# Altium PCB Anolog Input.PcbDoc
Units mm, origin at the board's own origin, x right, y up, seen from the top; angles counter-clockwise.
Board outline 37.5 x 45 mm, 2 copper layers (Top Layer, Bottom Layer); 22 components, 20 nets, 83 pads, 1 vias.
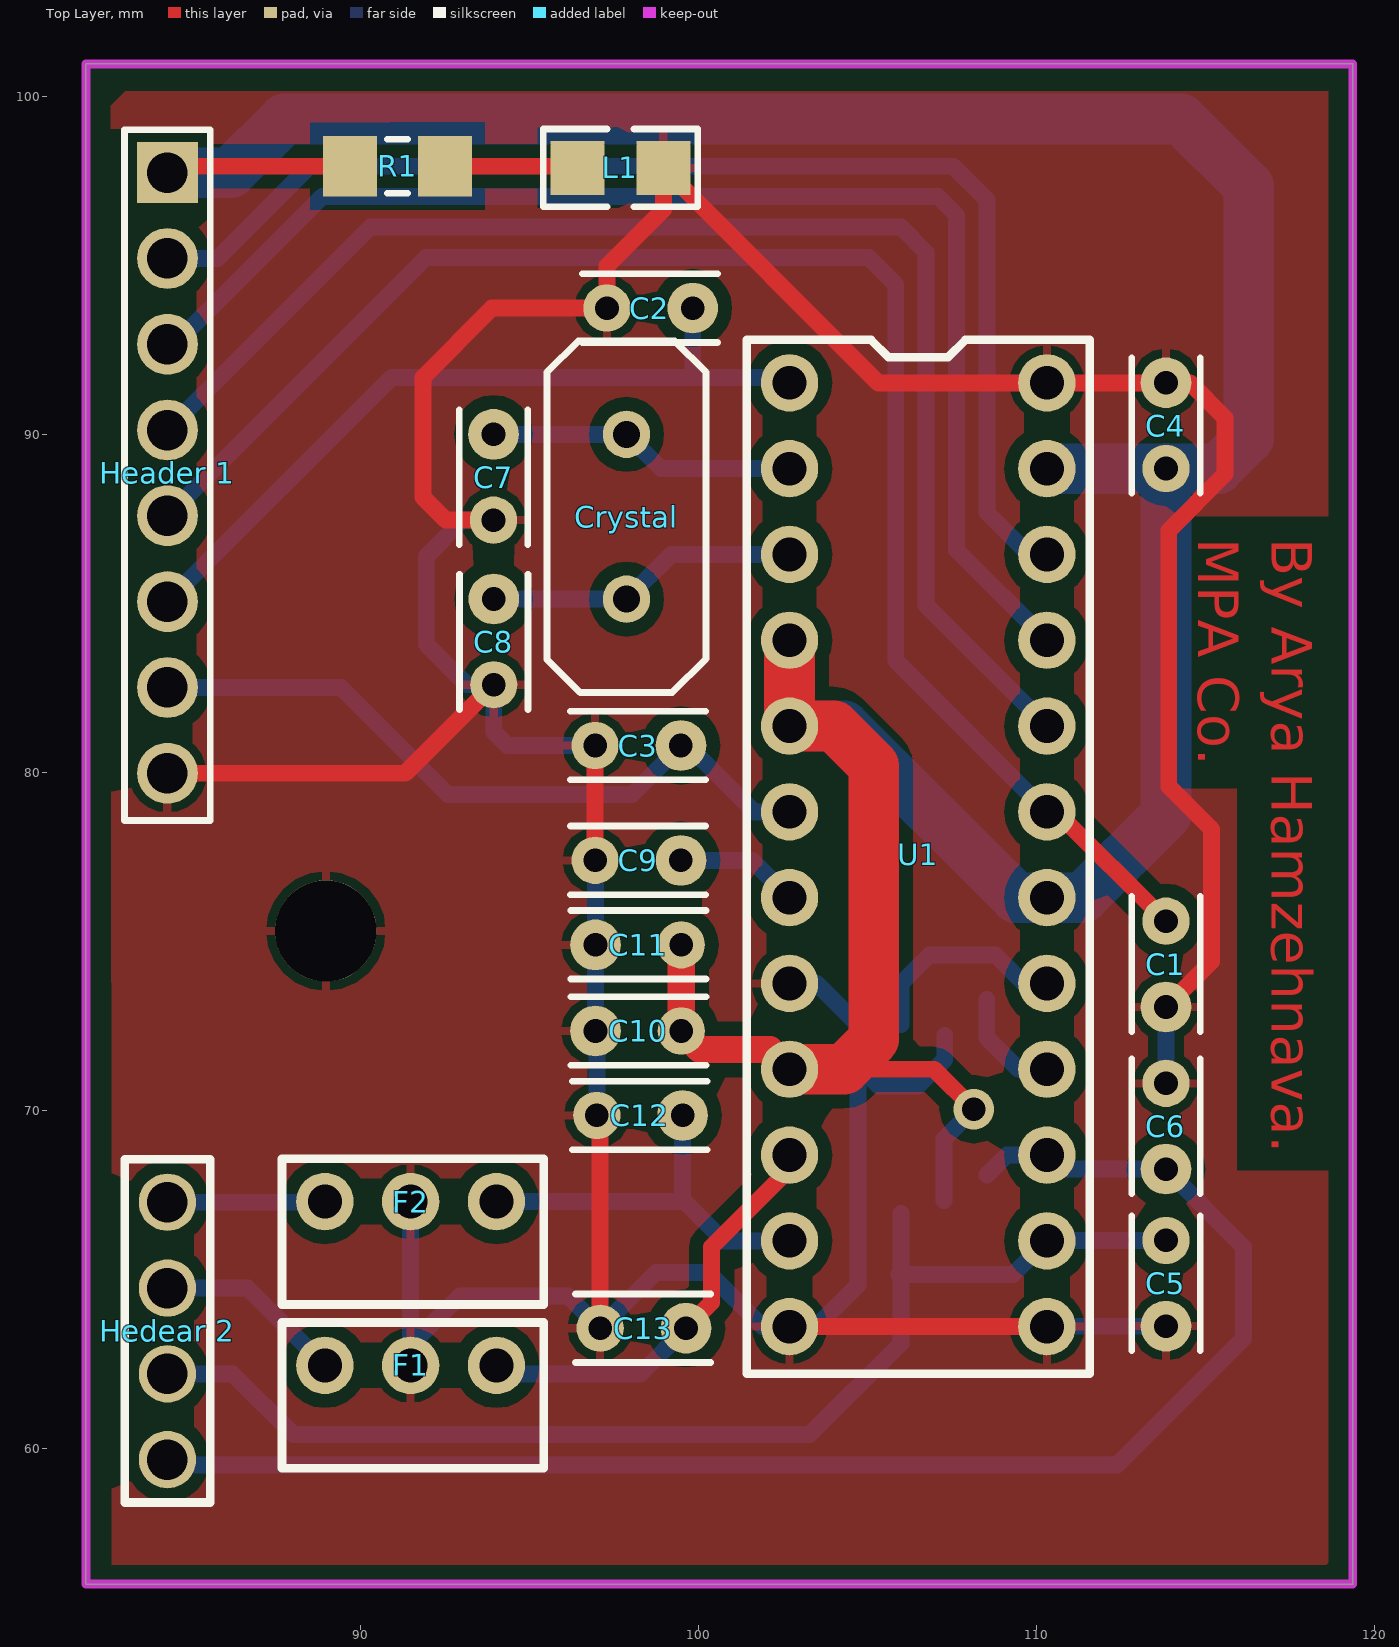
[diagram p0: Top Layer view]
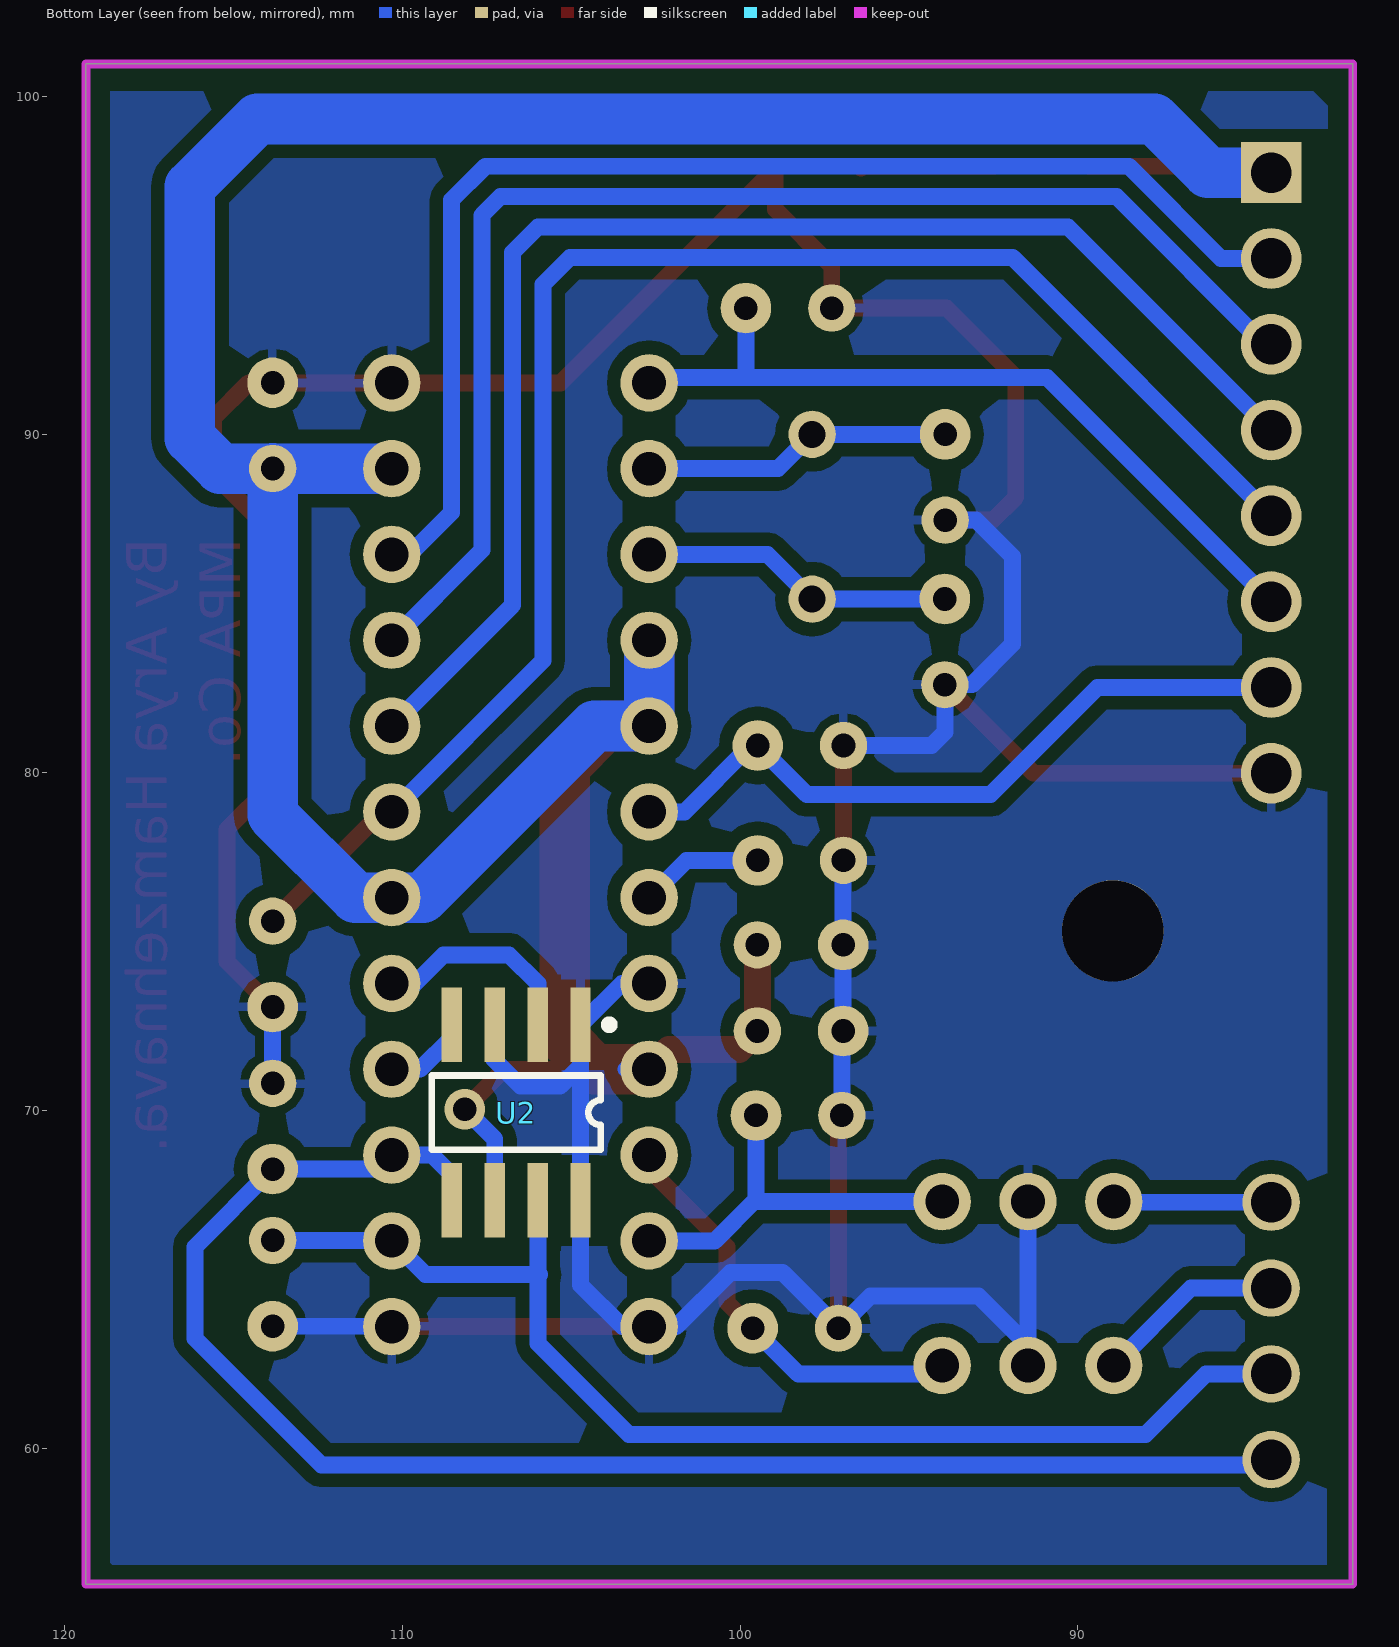
[diagram p1: Bottom Layer view, seen from below]

## Layer stack, top to bottom
Top Solder: solder mask 0.0102, Solder Resist, Dk 3.5
Top Layer: signal copper 0.0356
Dielectric 1: dielectric 0.32, FR-4, Dk 4.8
Bottom Layer: signal copper 0.0356
Bottom Solder: solder mask 0.0102, Solder Resist, Dk 3.5

## Board outline
81.864,100.975 119.363,100.975 119.363,55.975 81.863,55.975

## Design rules (kind name [scope] priority, off if disabled: settings)
Clearance [All] p1: gap=0.4
PolygonConnect [All] p1: connectstyle=Relief reliefconductorwidth=0.254 reliefentries=4 polygonreliefangle="90 Angle" airgapwidth=0.254
RoutingVias [All] p1: holewidth=0.711 width=1.27 viastyle="Through Hole" minholewidth=0.711 minwidth=1.27 maxholewidth=0.711 maxwidth=1.27
SolderMaskExpansion [All] p1: expansion=0.102
Width [All] p1: maxlimit=0.5 minlimit=0.5 preferedwidth=0.5
29 further rules are at their usual default settings.

## Components (designator, comment, footprint, x,y, rotation, side; value= is the part's Value field where it differs from the comment)
C1 "CAP without Pole" "ADACI CAP" 113.836,75.598 r270 top
C2 "CAP without Pole" "ADACI CAP" 97.286,93.748 r0 top
C3 "CAP without Pole" "ADACI CAP" 96.936,80.798 r0 top
C4 "CAP without Pole" "ADACI CAP" 113.836,88.998 r90 top
C5 "CAP without Pole" "ADACI CAP" 113.836,66.148 r270 top
C6 "CAP without Pole" "ADACI CAP" 113.836,70.798 r270 top
C7 "CAP without Pole" "ADACI CAP" 93.928,87.471 r90 top
C8 "CAP without Pole" "ADACI CAP" 93.936,82.598 r90 top
C9 "CAP without Pole" "ADACI CAP" 96.936,77.398 r0 top
C10 "CAP without Pole" "ADACI CAP" 99.486,72.348 r180 top
C11 "CAP without Pole" "ADACI CAP" 99.486,74.898 r180 top
C12 "CAP without Pole" "ADACI CAP" 96.986,69.848 r0 top
C13 "CAP without Pole" "ADACI CAP" 97.086,63.548 r0 top
Crystal "Crystal" "CRYSTAL - NORMAL" 97.865,90.011 r180 top
F1 "EMI Filter" "EMI FILTER" 88.936,62.448 r270 top
F2 "EMI Filter" "EMI FILTER" 88.936,67.298 r270 top
"Header 1" "Header 8" "header 8" 84.276,97.758 r270 top
"Hedear 2" "Hedear 4" "HEADER 4" 84.276,67.278 r270 top
L1 "LED" "LED SMD" 97.686,97.898 r0 top
R1 "Resistor" "RESISTOR SMD 1206" 92.486,97.948 r180 top
U1 "AD7730" "PDIP 24" 102.691,91.535 r0 top
U2 "ICL 7667" "SOIC 8" 104.086,70.948 r0 bottom

## Footprints (in the part's own frame and the unit in brackets; to place one, negate y for a bottom-side part, rotate by r counter-clockwise, add the part's x,y. Pads: shape width x height; smd on the part's side, far side on the other; paste and mask are expansions set on the pad)
"ADACI CAP" [mm]
  round 1.4 hole 0.7: 1(0,0)
  round 1.5 hole 0.7: 2(2.54,0)
  silkscreen extent -0.73,-1.01 3.27,1.01
"CRYSTAL - NORMAL" [mm]
  round 1.4 hole 0.8: 1(0,0) 2(0,4.88)
  silkscreen extent -2.35,-2.77 2.35,7.65
"EMI FILTER" [mm]
  round 1.7 hole 1: 1(0,0) 2(0,2.54) 3(0,5.08)
  silkscreen extent -1.27,-1.27 3.05,6.48
"HEADER 4" [mm]
  round 1.7 hole 1.2: 1(0,0) 2(2.54,0) 3(5.08,0) 4(7.62,0)
  silkscreen extent -1.27,-1.27 8.89,1.27
"header 8" [mm]
  rect 1.8x1.8 hole 1.2: 1(0,0)
  round 1.8 hole 1.2: 2(2.54,0) 3(5.08,0) 4(7.62,0) 5(10.16,0) 6(12.7,0) 7(15.24,0) 8(17.78,0)
  silkscreen extent -1.27,-1.27 19.18,1.27
"LED SMD" [mm]
  rect 1.6x1.6 smd: 1(-1.27,0) 2(1.27,0)
  silkscreen extent -2.29,-1.15 2.29,1.15
"PDIP 24" [mm]
  round 1.7 hole 1: 1(0,0) 2(0,-2.54) 3(0,-5.08) 4(0,-7.62) 5(0,-10.16) 6(0,-12.7) 7(0,-15.24) 8(0,-17.78) 9(0,-20.32) 10(0,-22.86) 11(0,-25.4) 12(0,-27.94) 13(7.62,-27.94) 14(7.62,-25.4) 15(7.62,-22.86) 16(7.62,-20.32) 17(7.62,-17.78) 18(7.62,-15.24) 19(7.62,-12.7) 20(7.62,-10.16) 21(7.62,-7.62) 22(7.62,-5.08) 23(7.62,-2.54) 24(7.62,0)
  silkscreen extent -1.27,-29.34 8.89,1.27, body extent 0,-29.34 7.62,1.4, height 4
"RESISTOR SMD 1206" [mm]
  rect 1.6x1.8 smd: 1(0,0) 2(2.8,0)
  silkscreen extent 1.1,-0.8 1.7,0.8
"SOIC 8" [mm]
  rect 0.6x2.2 smd: 1(0.635,-1.584) 2(1.905,-1.584) 3(3.175,-1.584) 4(4.445,-1.584) 5(4.445,3.616) 6(3.175,3.616) 7(1.905,3.616) 8(0.635,3.616)
  silkscreen extent -0.34,-1.71 5.04,2.12

## Free pads (board coordinates)
  round 3 hole 3: 4(88.964,75.309)

## Via types
v1: diameter 1.2, hole 0.7, Top Layer to Bottom Layer, 1 vias

## Nets (pads, with @x,y where several pads share a name; then routed paths per layer and width w, separated by ;. In a path a pad name is that pad's centre, name@x,y a point inside that pad or via, vN(x,y) a via of type N, cw(c..) or ccw(c..) an arc to the next point about the centre after c; other vN are vias at no path point)
AIN+: C13.2 F1.3 U1.10 | length 12.7
  Top Layer w0.5: C13.2 100.386,64.308 100.386,65.951 102.691,68.256 U1.10
  Bottom Layer w0.5: F1.3 94.266,62.198 98.276,62.198 C13.2
AIN-: C12.2 F2.3 U1.11 | length 11.7
  Bottom Layer w0.5: F2.3 99.526,67.298 ; C12.2 99.526,67.358 100.749,66.135 U1.11
CS: "Header 1.5" C1.1 U1.19 | length 47.4
  Top Layer w0.5: U1.19 110.599,78.835 C1.1
  Bottom Layer w0.5: 84.276,87.598 91.926,95.248 105.036,95.248 105.836,94.448 105.836,83.31 U1.19
"D IN": "Header 1.2" U1.22 | length 37.3
  Bottom Layer w0.5: 84.276,95.218 85.756,95.218 88.486,97.948 107.536,97.948 108.536,96.948 108.536,87.698 109.779,86.455 U1.22
"D OUT": "Header 1.3" U1.21 | length 39.1
  Bottom Layer w0.5: 84.276,92.678 84.489,92.678 88.859,97.048 107.086,97.048 107.636,96.498 107.636,86.59 U1.21
GND: "Header 1.8" C1.2 C2.1 C3.1 C4.2 C5.2 C6.1 C7.1 C8.1 C9.1 C10.2 C11.2 C12.1 C13.1 F1.2 F2.2 L1.2 pad.4 U1.8 U1.12 U1.13 U1.24 U2.1 U2.3 U2.8 | length 145
  Top Layer w0.5: 84.276,79.978 91.316,79.978 C8.1 ; C7.1 92.513,87.471 91.836,88.148 91.836,91.698 93.886,93.748 C2.1 97.286,94.998 98.956,96.668 L1.2 105.319,91.535 U1.24 C4.2@113.833,91.535 ; C9.1 C3.1 ; C13.1 C12.1@97.086,69.748 ; U1.12 U1.13 ; C1.2 115.186,74.408 115.186,78.321 113.92,79.587 113.92,87.169 115.589,88.838 115.589,90.492 114.543,91.538 C4.2
  Bottom Layer w0.5: F2.2 F1.2 91.476,63.038 92.936,64.498 96.136,64.498 C13.1 98.736,65.198 100.286,65.198 101.889,63.595 U1.12 103.483,63.595 104.721,64.833 U2.8 104.721,71.315 ; C7.1 93.009,87.471 91.936,86.398 91.936,83.798 93.136,82.598 C8.1 93.936,81.198 94.336,80.798 C3.1 ; C9.1 96.946,77.388 C11.2 C10.2 96.986,72.308 C12.1 ; U1.8 103.498,73.755 U2.1 104.721,71.315 ; U2.3@107.288,72.212 107.288,71.509 106.494,70.715 105.322,70.715 104.721,71.315 ; U1.13 110.324,63.608 C5.2 ; C6.1 C1.2
"IN A": U1.17 U2.2 | length 6.2
  Bottom Layer w0.5: U2.2@105.986,72.537 105.986,73.748 106.836,74.598 108.785,74.598 109.628,73.755 U1.17
"IN B": U1.16 U2.4 | length 3.3
  Bottom Layer w0.5: U2.4@108.531,73.282 108.531,72.153 109.469,71.215 U1.16
NetC7_2: C7.2 Crystal.1 U1.2 | length 9.2
  Bottom Layer w0.5: C7.2 Crystal.1 98.881,88.995 U1.2
NetC8_2: C8.2 Crystal.2 U1.3 | length 9.3
  Bottom Layer w0.5: C8.2 93.943,85.131 Crystal.2 99.189,86.455 U1.3
NetC9_2: C9.2 U1.7 | length 3.7
  Bottom Layer w0.5: C9.2 101.588,77.398 U1.7
NetF1_1: "Hedear 2.2" F1.1 | length 5.6
  Bottom Layer w0.5: 84.276,64.738 86.646,64.738 F1.1
NetF2_1: "Hedear 2.1" F2.1 | length 4.7
  Bottom Layer w0.5: 84.276,67.278 88.916,67.278 F2.1
NetL1_1: L1.1 R1.1 | length 4
  Top Layer w0.5: R1.1 96.366,97.948 L1.1
"OUT A": "Hedear 2.3" C5.1 U1.14 U2.7 | length 35.7
  Bottom Layer w0.5: 84.276,62.198 86.201,62.198 88.001,60.398 103.286,60.398 105.986,63.098 U2.7@105.986,66.948 ; 105.936,65.135 109.311,65.135 110.324,66.148 C5.1
"OUT B": "Hedear 2.4" C6.2 U1.15 U2.5 | length 45.2
  Bottom Layer w0.5: 84.276,59.658 84.436,59.498 112.386,59.498 116.136,63.248 116.136,65.958 C6.2 110.728,68.258 U1.15 109.124,68.675 U2.5@108.531,68.082
RDY: "Header 1.4" U1.20 | length 40.8
  Bottom Layer w0.5: 84.276,90.138 90.286,96.148 105.986,96.148 106.736,95.398 106.736,84.95 U1.20
RESET: "Header 1.7" C3.2 U1.6 | length 21.1
  Bottom Layer w0.5: 84.276,82.518 89.416,82.518 92.586,79.348 98.026,79.348 C3.2 99.686,80.798 101.649,78.835 U1.6
SCLK: "Header 1.6" C2.2 U1.1 | length 23.4
  Bottom Layer w0.5: 84.276,85.058 90.916,91.698 102.528,91.698 U1.1 ; 99.826,91.708 C2.2@99.826,93.848
VCC: "Header 1.1" C4.1 C10.1 C11.1 R1.2 U1.4 U1.5 U1.9 U1.18 U1.23 U2.6 | length 110.6
  Top Layer w0.5: 84.276,97.758 84.466,97.948 R1.2 ; 104.303,71.215 106.971,71.215 v1(108.15,70.035)
  Top Layer w0.8: C11.1 C10.1 100.036,71.798 102.108,71.798 U1.9
  Top Layer w1.5: U1.9 104.303,71.215 105.186,72.098 105.186,80.198 104.009,81.375 U1.5 U1.4
  Bottom Layer w0.5: U1.9 U1.9@103.378,71.215 ; U2.6 107.261,69.146 v1(108.15,70.035)
  Bottom Layer w1.5: 84.276,97.758 86.146,97.758 87.736,99.348 114.286,99.348 116.286,97.348 116.286,89.898 115.383,88.995 U1.23 ; U1.4 U1.5 104.309,81.375 109.389,76.295 111.383,76.295 113.836,78.748 C4.1

## Polygon pours and split planes (outlines as drawn)
GND on Top Layer "Top Layer-No Net" (solid, pour order 2): 82.603,100.224 82.659,100.168 118.646,100.168 118.646,56.601 118.642,56.597 118.587,56.543 82.628,56.543
GND on Bottom Layer "Top Layer-No Net" (solid, pour order 2): 82.603,100.224 82.659,100.168 118.646,100.168 118.646,56.601 118.642,56.597 118.587,56.543 82.628,56.543

## Keep-outs
Keep-Out Layer:
  the board outline again, w0.254

## Other copper
Top Layer:
  text "MPA Co." at 114.793,86.939 h1.2 r270
  text "By Arya Hamzehnava." at 116.968,86.939 h1.2 r270